# EAGLE board fb_up_2-4fach_tastsensor (EAGLE 5.00)
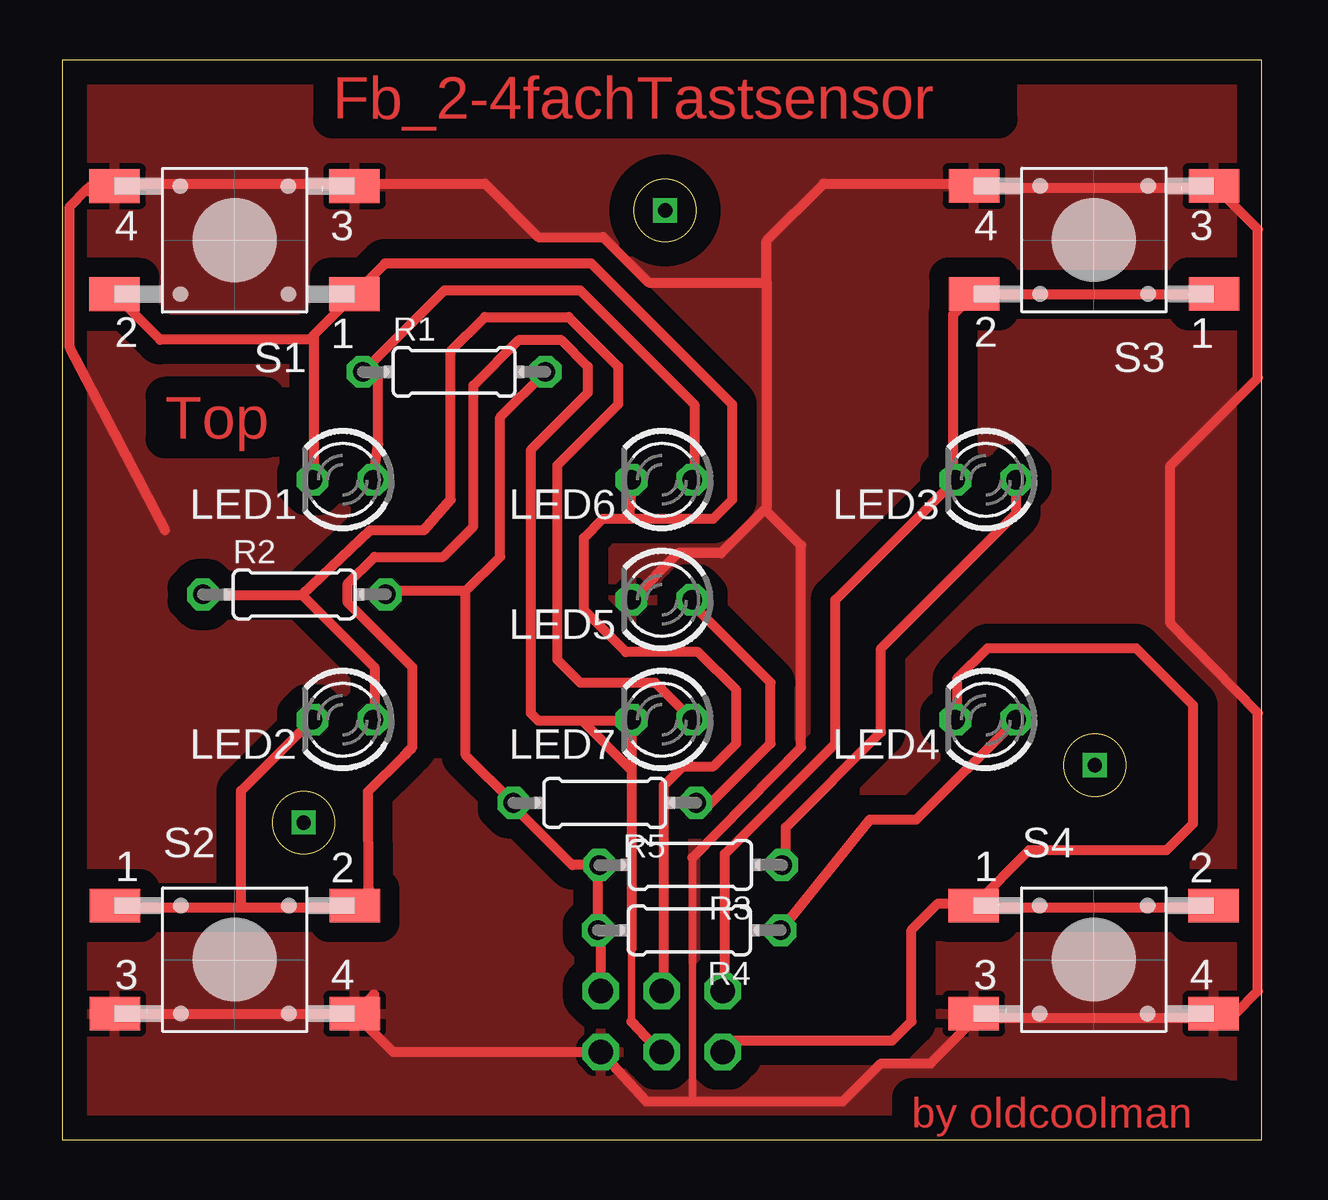
[diagram p0: board, top side]
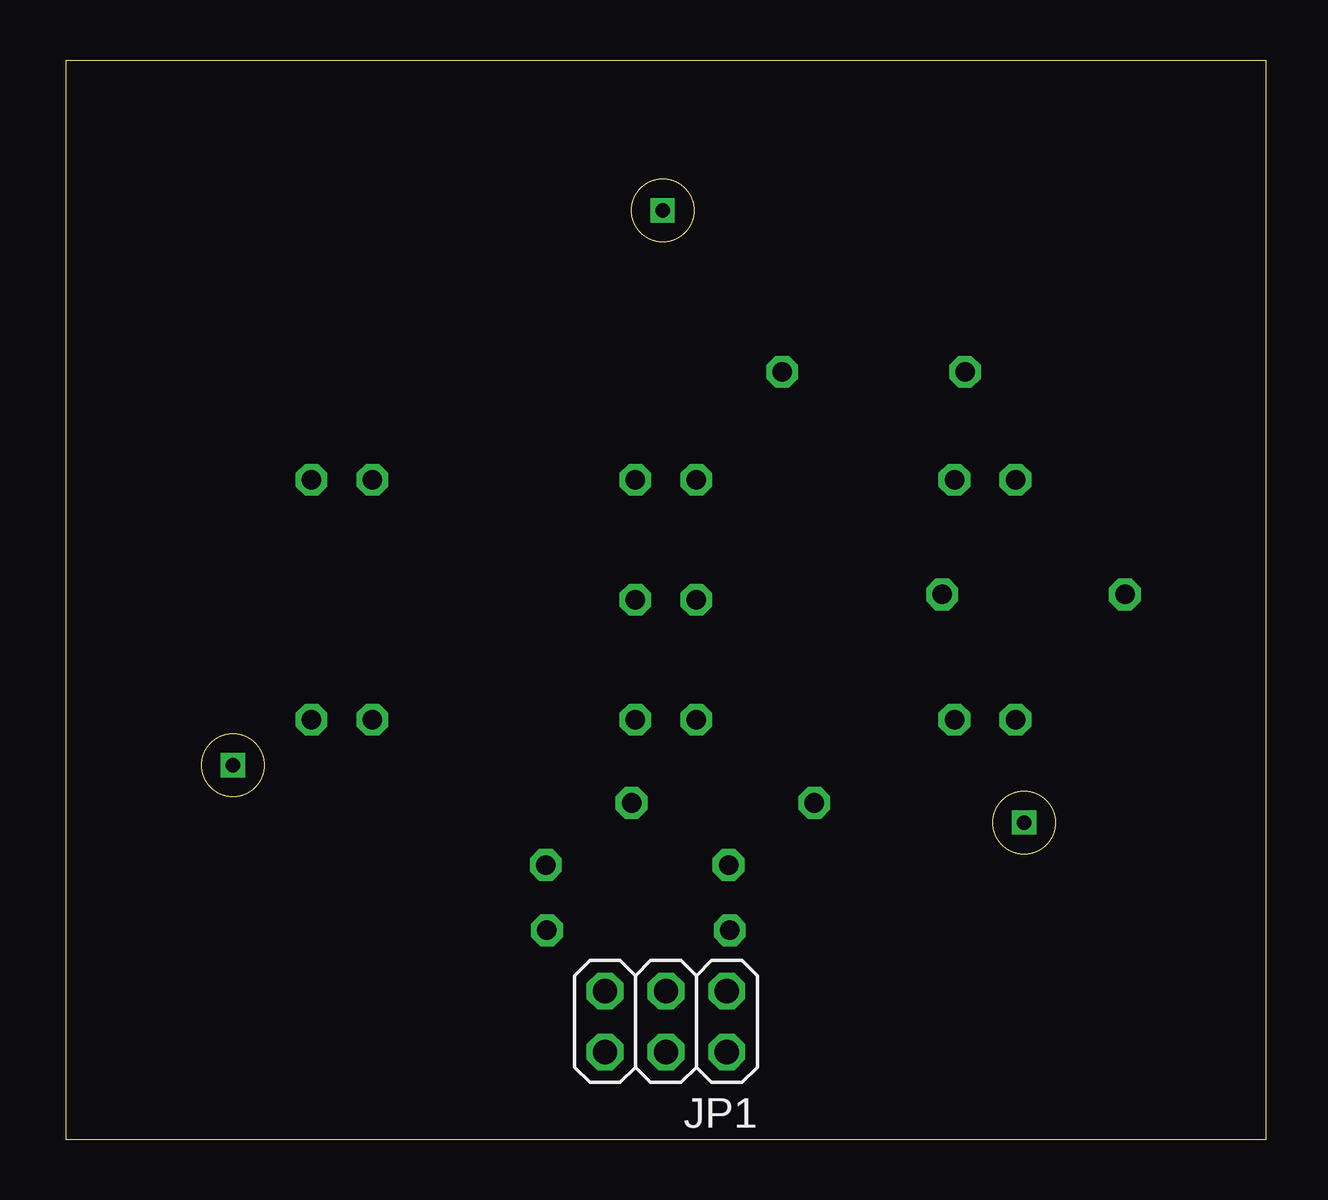
[diagram p1: board, bottom side, seen from below]

Size 50 x 45 mm. Coordinates in mm from the lower left corner, seen from the top.
Outline: 0,0 50,0 50,45 0,45 0,0
Outline: circle at 10.07,13.21 radius 1.3
Outline: circle at 25.13,38.73 radius 1.3
Outline: circle at 43.05,15.6 radius 1.3
Copper layers (1*16): Top 0.035mm / dielectric 1.5mm / Bottom 0.035mm
Design rules "default": minimum track width 10mil, minimum drill 24mil, track to track 8mil, track to pad 8mil, pad to pad 8mil, via to via 8mil, smd to smd 8mil, copper to edge 40mil, drill to drill 8mil, minimum pad ring 10mil, minimum via ring 8mil, stop-mask expansion 4mil, vias tented up to drill 0mil, thermal gap 10mil
tKeepout: area 30.4,17.9 to 31.7,21.2; area 18.2,17.9 to 19.5,27.9; area 0,17.2 to 5,27.2; area 14.5,17.2 to 19.5,27.2; area 30.4,17.2 to 35.4,27.2; area 45,17.2 to 50,27.2; area 0,0 to 50,2.8; area 0,42.2 to 50,45; area 22.6,38.3 to 27.6,39.2; area 9.5,11 to 10.6,15.4; area 42.5,13.4 to 43.5,17.8; area 0,0 to 2.2,45; 1 more areas
bKeepout: area 16.3,44 to 33.8,45; area 46,0.1 to 50,45; area 0,0 to 49.9,1; area 0,0.1 to 4.2,45; area 4.1,38.3 to 10.4,44.9; area 10.4,41.7 to 13.8,45; area 13.8,43.2 to 15.5,45; area 4.2,35 to 7,38.3; area 4.2,33.4 to 5.4,34.9; area 7.1,36.6 to 8.6,38.2; area 10.4,39.9 to 12.1,41.7; area 4.1,0.8 to 9.2,7.7; 25 more areas; 10 lines

## Footprints (pad centres in the part's own frame; a part is rotated, then mirrored left to right if it is on the bottom)
2X03 = drill 1.016 octagon: 1 -2.54,-1.27; 2 -2.54,1.27; 3 0,-1.27; 4 0,1.27; 5 2.54,-1.27; 6 2.54,1.27
LED3MM = drill 0.813 octagon: A -1.27,0; K 1.27,0
0204/7 = drill 0.813 octagon: 1 -3.81,0; 2 3.81,0
TASTER-9314_SMD = smd 2.1 x 1.4: 1 -5,2.25; 2 5,2.25; 3 -5,-2.25; 4 5,-2.25

## Placement (x,y rotation side)
JP1  [2X03]  25,4.92 180 bottom
LED1  [LED3MM]  11.7,27.5 180 top
LED2  [LED3MM]  11.7,17.5 180 top
LED3  [LED3MM]  38.5,27.5 180 top
LED4  [LED3MM]  38.5,17.5 180 top
LED5  [LED3MM]  25,22.5 180 top
LED6  alternativ  [LED3MM]  25,27.5 180 top
LED7  alternativ  [LED3MM]  25,17.5 180 top
R1  [0204/7]  16.34,32 0 top
R2  [0204/7]  9.68,22.72 0 top
R3  [0204/7]  26.2,11.45 180 top
R4  [0204/7]  26.15,8.72 180 top
R5  [0204/7]  22.62,14.03 180 top
S1  [TASTER-9314_SMD]  7.19,37.49 180 top
S2  [TASTER-9314_SMD]  7.2,7.5 0 top
S3  [TASTER-9314_SMD]  43.01,37.5 180 top
S4  [TASTER-9314_SMD]  43,7.5 0 top

## Library data of the parts
JP1 = pinhead
LED1-LED7 = led
R1-R5 = rcl
S1-S4 = Ergaenzung

## Nets
GND: JP1.2 LED5.K S1.3 S1.4 S2.3 S2.4 S3.3 S3.4 S4.3 S4.4
N$5: LED1.A LED6.A R1.1
N$6: LED2.A LED7.A R2.1
N$7: LED3.A R3.1
N$8: LED4.A R4.1
N$9: LED5.A R5.1
N$10: JP1.1 R1.2 R2.2 R3.2 R4.2 R5.2
N$11: JP1.3 LED1.K LED6.K S1.1 S1.2
N$12: JP1.4 LED2.K LED7.K S2.1 S2.2
N$13: JP1.5 LED3.K S3.1 S3.2
N$14: JP1.6 LED4.K S4.1 S4.2

## Tracks (layer width: path | path; a pad name or v marks a point on that pad's centre or on a via)
GND
  Top 0.305: 26.27,1.59 26.27,11.75
  Top 0.406: 48.2,39.88 48.13,39.88 S3.3 47.95,39.69 38.07,39.69 S3.4 37.91,39.85 31.75,39.85 29.37,37.47 29.37,35.72 | 47.98,5.27 S4.4 47.94,5.19 47.94,5.08 38.42,5.08 38.26,5.24 | 1.03,39.61 0.32,38.89 0.32,33.02 4.29,25.4 | 1.03,39.61 1.11,39.69 | S2.4 13.8,3.65 JP1.2 24.36,1.59 32.54,1.59 34.13,3.17 36.2,3.17 38.26,5.24 | 38.26,5.24 S4.3 | LED5.K 25.68,24.45 27.46,24.45 29.37,26.35 29.37,35.72 | 29.37,35.72 24.45,35.72 22.54,37.62 19.85,37.62 17.62,39.85 12.3,39.85 S1.3 12.08,39.85 2.3,39.85 S1.4 1.98,39.53 1.11,39.53 | S2.4 12.98,6.03 13.02,6.03 | S2.4 12.19,5.24 S2.3 | 1.11,39.53 | 1.03,39.61 1.11,39.53 | 48.26,39.53 49.85,37.94 49.85,31.75 46.2,28.1 46.2,21.51 49.85,17.78 49.85,6.19 48.9,5.24 48.26,5.24 48.26,5.4 | 26.27,11.75 30.8,16.35 30.8,24.77 29.37,26.19
  pour Top (isolate 0.813): -0.32,45.4 50.64,45.4 50.8,45.24 50.8,-0.64 -0.32,-0.64
N$1  (via drill 0.6)
  other vias: 25.14,38.73
N$2  (via drill 0.6)
  other vias: 10.07,13.21
N$3  (via drill 0.6)
  other vias: 43.05,15.6
N$5
  Top 0.406: LED1.A 13.18,28.98 13.18,31.98 R1.1 15.93,35.4 21.59,35.4 26.35,30.64 26.35,27.58 LED6.A
N$6
  Top 0.406: 12.86,17.46 12.93,17.46 LED2.A 13.02,17.55 13.02,19.68 10,22.7 | R2.1 5.88,22.7 10,22.7 | LED7.A 24.72,19.05 21.59,19.05 20.64,20 20.64,28.1 23.18,30.64 23.18,32.23 21.12,34.29 17.62,34.29 16.19,32.86 16.19,26.67 15.08,25.4 12.86,25.4 10,22.7 | 10,22.7
N$7
  Top 0.406: LED3.A 39.77,26.12 34.13,20.48 34.13,16.99 30.16,13.02 30.16,11.75 30.01,11.59 R3.1
N$8
  Top 0.406: R4.1 33.66,13.3 33.66,13.34 35.61,13.34 LED4.A
N$9
  Top 0.406: R5.1 26.83,13.97 26.99,13.97 29.53,16.51 29.53,19.05 26.35,22.23 26.35,22.54 26.31,22.54 LED5.A
N$10
  Top 0.406: R1.2 18.26,30.11 18.26,24.29 16.83,22.86 | R2.2 13.63,22.86 16.83,22.86 | 16.83,22.86 16.83,16.01 R5.2 18.8,14.03 18.73,13.97 21.26,11.45 R3.2 22.39,11.59 22.34,11.54 R4.2 22.34,8.62 22.46,8.5 JP1.1
N$11
  Top 0.406: LED1.K 10.48,27.55 10.48,33.34 | 10.48,33.34 10.48,33.53 S1.1 13.46,36.51 22.07,36.51 27.94,30.64 27.94,26.67 27.15,25.88 23.66,25.88 | LED6.K 23.78,27.5 23.66,25.88 | S1.2 4.09,33.34 10.48,33.34 | 23.66,25.88 22.54,25.88 21.75,25.08 21.75,22.07 23.5,20.32 26.51,20.32 28.1,18.73 28.1,16.51 27.15,15.56 25.88,15.56 25.08,14.76 25.08,6.28 JP1.3
N$12
  Top 0.305: 23.73,7.94 23.73,7.86 23.73,4.92
  Top 0.406: LED2.K 7.46,14.53 7.46,9.68 7.62,9.68 | 7.62,9.68 12.13,9.68 S2.2 12.2,9.82 12.78,10.4 | JP1.4 24.93,3.72 24.93,3.65 23.73,4.92 | 23.73,7.94 23.73,17.42 LED7.K 23.69,17.46 21.67,17.46 | 12.78,10.4 12.78,10.48 | 12.78,10.4 12.78,10.32 12.76,14.5 14.29,16.03 14.45,16.19 14.61,16.35 14.61,19.68 11.91,22.38 11.91,23.18 13.02,24.29 15.88,24.29 17.15,25.56 17.15,31.43 19.05,33.34 20.8,33.34 21.91,32.23 21.91,31.11 19.53,28.73 19.53,17.78 19.85,17.46 21.67,17.46 | S2.1 2.27,9.68 7.62,9.68 | 21.67,17.46 23.66,15.48
N$13
  Top 0.406: 47.88,35.11 47.88,35.12 S3.1 S3.2 37.15,34.39 37.15,27.58 LED3.K 32.23,22.5 32.23,16.51 27.62,11.91 27.62,6.67 27.78,6.51 27.54,6.26 JP1.5 27.62,6.28 27.62,6.51
N$14
  Top 0.406: 47.96,9.71 S4.2 47.93,9.68 37.94,9.68 37.94,9.69 S4.1 | S4.1 40.31,12.06 46.04,12.06 47.15,13.18 47.15,18.1 44.77,20.48 38.58,20.48 37.31,19.21 37.31,17.58 LED4.K | JP1.6 28.02,4.13 34.61,4.13 35.4,4.92 35.4,8.73 36.51,9.84 37.91,9.84 S4.1

## Text on the board
Top: Fb_2-4fachTastsensor | Top | by oldcoolman
tDocu: top | tiefe hinten 2.84 | tiefe vorne 2.8 | Platine 1.00mm | bottom